# Altium PCB 9981_dome_sheet_PCB.pcbdoc
Units mil, origin at the board's own origin, x right, y up, seen from the top; angles counter-clockwise.
Board outline 5322 x 5187.5 mil, 2 copper layers (Top Layer, Bottom Layer); 80 components, 80 nets, 181 pads, 264 vias.
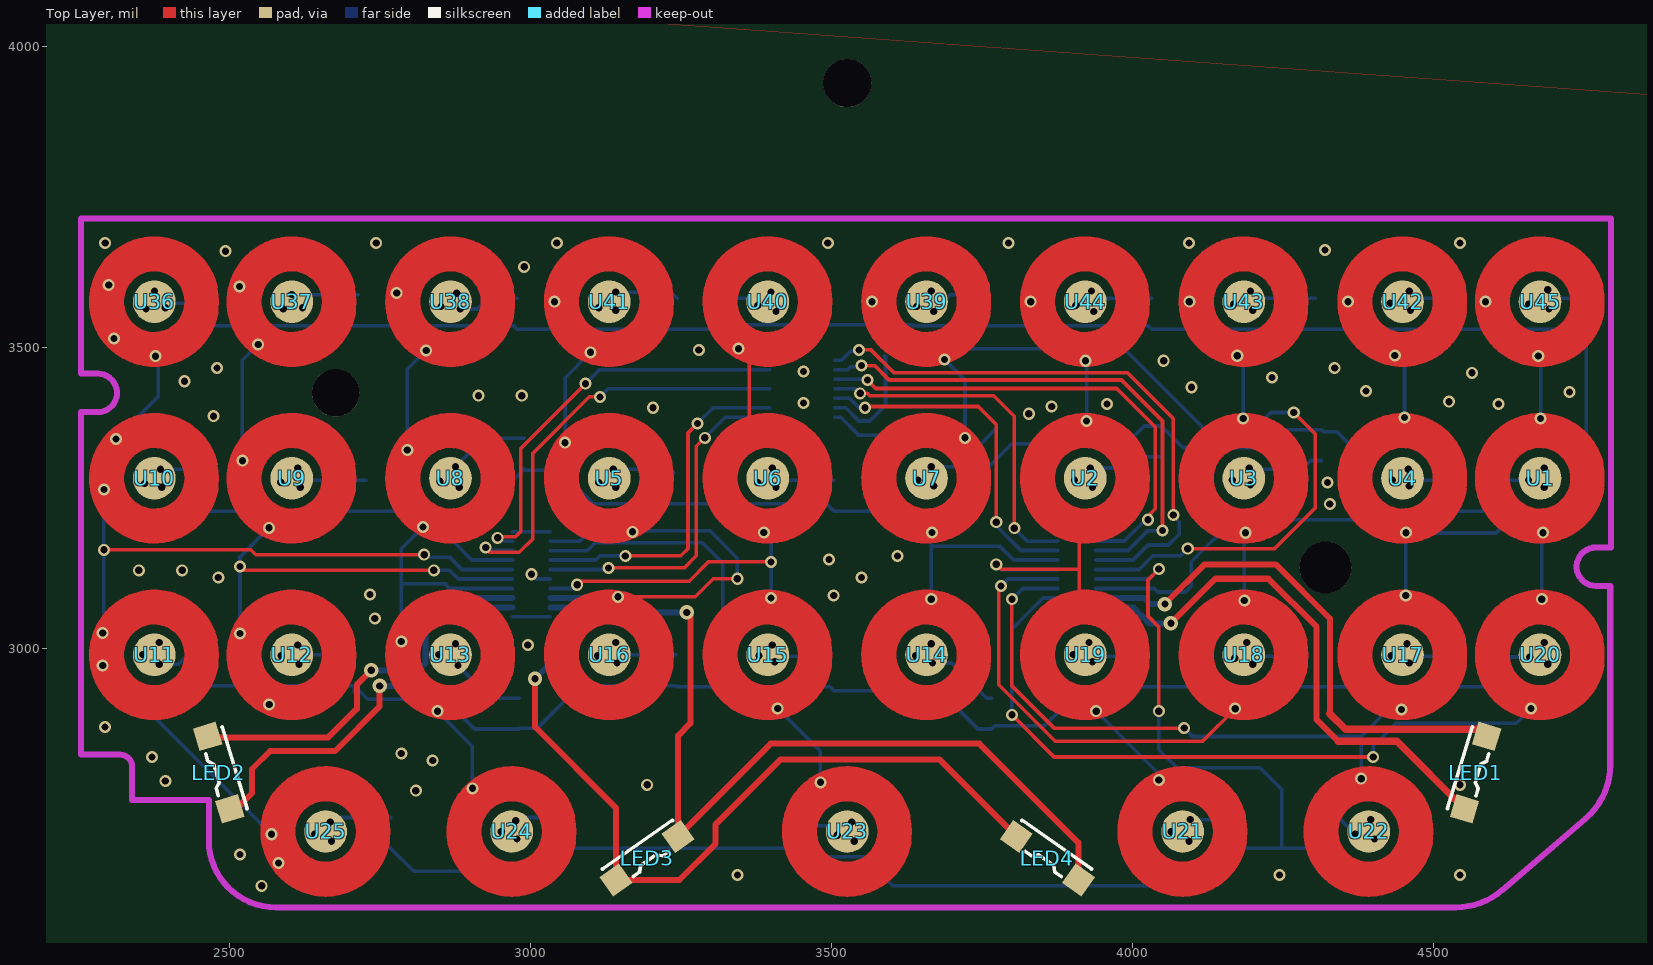
[diagram p0: Top Layer view]
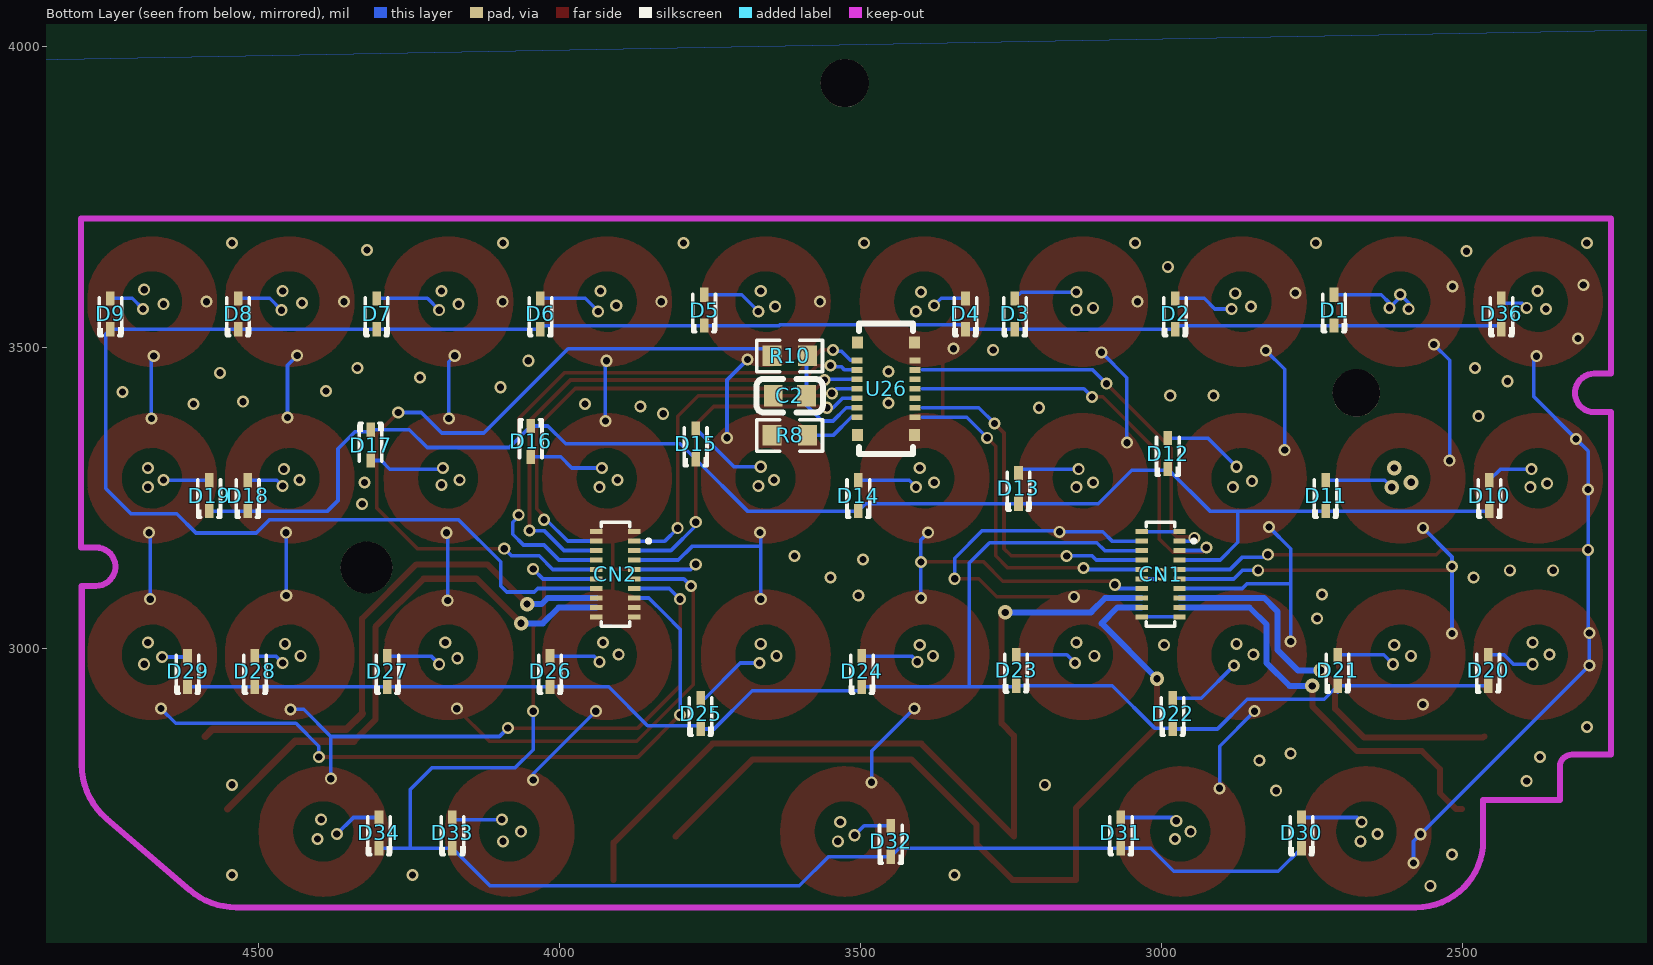
[diagram p1: Bottom Layer view, seen from below]

## Layer stack, top to bottom
Top Layer: signal copper (thickness not stored)
Dielectric: dielectric 12.6, FR-4, Dk 4.8
Bottom Layer: signal copper (thickness not stored)

## Board outline
6322,1000 1000,1000 1000,6187.5 6322,6187.5

## Components (designator, comment, footprint, x,y, rotation, side; value= is the part's Value field where it differs from the comment)
C2 "100nF" C0603 3617.7,3419.89 r0 bottom
CN1 "BM20B(0.8)-16DP-0.4V(51)" CONN-SMD_16P-P0.40_HRS_BM20B-16DP-0.4V 3002.03,3123.45 r270 bottom
CN2 "BM20B(0.8)-16DP-0.4V(51)" CONN-SMD_16P-P0.40_HRS_BM20B-16DP-0.4V 3907.54,3123.45 r270 bottom
D1 "1N4148WT_C232841" SOD-523_L1.2-W0.8-LS1.6-RD 2714,3562 r270 bottom
D2 "1N4148WT_C232841" SOD-523_L1.2-W0.8-LS1.6-RD 2978,3556 r270 bottom
D3 "1N4148WT_C232841" SOD-523_L1.2-W0.8-LS1.6-RD 3244,3556 r270 bottom
D4 "1N4148WT_C232841" SOD-523_L1.2-W0.8-LS1.6-RD 3326,3556 r270 bottom
D5 "1N4148WT_C232841" SOD-523_L1.2-W0.8-LS1.6-RD 3760,3562 r270 bottom
D6 "1N4148WT_C232841" SOD-523_L1.2-W0.8-LS1.6-RD 4032,3556 r270 bottom
D7 "1N4148WT_C232841" SOD-523_L1.2-W0.8-LS1.6-RD 4304,3556 r270 bottom
D8 "1N4148WT_C232841" SOD-523_L1.2-W0.8-LS1.6-RD 4534,3556 r270 bottom
D9 "1N4148WT_C232841" SOD-523_L1.2-W0.8-LS1.6-RD 4746,3556 r270 bottom
D10 "1N4148WT_C232841" SOD-523_L1.2-W0.8-LS1.6-RD 2456,3254 r270 bottom
D11 "1N4148WT_C232841" SOD-523_L1.2-W0.8-LS1.6-RD 2728,3254 r270 bottom
D12 "1N4148WT_C232841" SOD-523_L1.2-W0.8-LS1.6-RD 2990,3324 r270 bottom
D13 "1N4148WT_C232841" SOD-523_L1.2-W0.8-LS1.6-RD 3238,3266 r270 bottom
D14 "1N4148WT_C232841" SOD-523_L1.2-W0.8-LS1.6-RD 3504,3254 r270 bottom
D15 "1N4148WT_C232841" SOD-523_L1.2-W0.8-LS1.6-RD 3774,3340 r270 bottom
D16 "1N4148WT_C232841" SOD-523_L1.2-W0.8-LS1.6-RD 4048,3344 r90 bottom
D17 "1N4148WT_C232841" SOD-523_L1.2-W0.8-LS1.6-RD 4314,3338 r90 bottom
D18 "1N4148WT_C232841" SOD-523_L1.2-W0.8-LS1.6-RD 4518,3254 r270 bottom
D19 "1N4148WT_C232841" SOD-523_L1.2-W0.8-LS1.6-RD 4582,3254 r270 bottom
D20 "1N4148WT_C232841" SOD-523_L1.2-W0.8-LS1.6-RD 2458,2964 r270 bottom
D21 "1N4148WT_C232841" SOD-523_L1.2-W0.8-LS1.6-RD 2708,2964 r270 bottom
D22 "1N4148WT_C232841" SOD-523_L1.2-W0.8-LS1.6-RD 2982,2892 r270 bottom
D23 "1N4148WT_C232841" SOD-523_L1.2-W0.8-LS1.6-RD 3242,2964 r270 bottom
D24 "1N4148WT_C232841" SOD-523_L1.2-W0.8-LS1.6-RD 3498,2962 r270 bottom
D25 "1N4148WT_C232841" SOD-523_L1.2-W0.8-LS1.6-RD 3766,2892 r270 bottom
D26 "1N4148WT_C232841" SOD-523_L1.2-W0.8-LS1.6-RD 4016,2962 r270 bottom
D27 "1N4148WT_C232841" SOD-523_L1.2-W0.8-LS1.6-RD 4286,2962 r270 bottom
D28 "1N4148WT_C232841" SOD-523_L1.2-W0.8-LS1.6-RD 4506,2962 r270 bottom
D29 "1N4148WT_C232841" SOD-523_L1.2-W0.8-LS1.6-RD 4618,2962 r270 bottom
D30 "1N4148WT_C232841" SOD-523_L1.2-W0.8-LS1.6-RD 2768,2694 r270 bottom
D31 "1N4148WT_C232841" SOD-523_L1.2-W0.8-LS1.6-RD 3068,2694 r270 bottom
D32 "1N4148WT_C232841" SOD-523_L1.2-W0.8-LS1.6-RD 3450,2680 r270 bottom
D33 "1N4148WT_C232841" SOD-523_L1.2-W0.8-LS1.6-RD 4178,2694 r270 bottom
D34 "1N4148WT_C232841" SOD-523_L1.2-W0.8-LS1.6-RD 4300,2694 r270 bottom
D36 "1N4148WT_C232841" SOD-523_L1.2-W0.8-LS1.6-RD 2436,3556 r270 bottom
LED1 "TJ-S3806SW1TGLCCW-A5" LED-SMD_L3.8-W1.0-RD 4570,2794 r253 top
LED2 "TJ-S3806SW1TGLCCW-A5" LED-SMD_L3.8-W1.0-RD 2482.8,2793.99 r107 top
LED3 "TJ-S3806SW1TGLCCW-A5" LED-SMD_L3.8-W1.0-RD 3194,2652 r215 top
LED4 "TJ-S3806SW1TGLCCW-A5" LED-SMD_L3.8-W1.0-RD 3858.8,2652 r145 top
R8 "10kΩ" R0603 3618,3354 r180 bottom
R10 "10kΩ" R0603 3618,3486 r0 bottom
U1 "锅仔片_9981" 锅仔片_封装 4677.07,3282.9 r0 top
U2 "锅仔片_9981" 锅仔片_封装 3921.67,3282.9 r0 top
U3 "锅仔片_9981" 锅仔片_封装 4185.22,3282.9 r0 top
U4 "锅仔片_9981" 锅仔片_封装 4448.72,3282.9 r0 top
U5 "锅仔片_9981" 锅仔片_封装 3131.12,3282.9 r0 top
U6 "锅仔片_9981" 锅仔片_封装 3394.63,3282.9 r0 top
U7 "锅仔片_9981" 锅仔片_封装 3658.17,3282.9 r0 top
U8 "锅仔片_9981" 锅仔片_封装 2867.58,3282.9 r0 top
U9 "锅仔片_9981" 锅仔片_封装 2604.08,3282.9 r0 top
U10 "锅仔片_9981" 锅仔片_封装 2375.73,3282.9 r0 top
U11 "锅仔片_9981" 锅仔片_封装 2375.73,2989.59 r0 top
U12 "锅仔片_9981" 锅仔片_封装 2604.08,2989.59 r0 top
U13 "锅仔片_9981" 锅仔片_封装 2867.58,2989.59 r0 top
U14 "锅仔片_9981" 锅仔片_封装 3658.17,2989.59 r0 top
U15 "锅仔片_9981" 锅仔片_封装 3394.62,2989.59 r0 top
U16 "锅仔片_9981" 锅仔片_封装 3131.12,2989.59 r0 top
U17 "锅仔片_9981" 锅仔片_封装 4448.72,2989.59 r0 top
U18 "锅仔片_9981" 锅仔片_封装 4185.22,2989.59 r0 top
U19 "锅仔片_9981" 锅仔片_封装 3921.67,2989.59 r0 top
U20 "锅仔片_9981" 锅仔片_封装 4677.07,2989.59 r0 top
U21 "锅仔片_9981" 锅仔片_封装 4083.49,2696.28 r0 top
U22 "锅仔片_9981" 锅仔片_封装 4392.54,2696.28 r0 top
U23 "锅仔片_9981" 锅仔片_封装 3526.4,2696.28 r0 top
U24 "锅仔片_9981" 锅仔片_封装 2969.31,2696.28 r0 top
U25 "锅仔片_9981" 锅仔片_封装 2660.26,2696.28 r0 top
U26 "5035481420" 5035481420 3458.01,3431.32 r90 bottom
U36 "锅仔片_9981" 锅仔片_封装 2375.73,3576.2 r0 top
U37 "锅仔片_9981" 锅仔片_封装 2604.08,3576.2 r0 top
U38 "锅仔片_9981" 锅仔片_封装 2867.58,3576.2 r0 top
U39 "锅仔片_9981" 锅仔片_封装 3658.17,3576.2 r0 top
U40 "锅仔片_9981" 锅仔片_封装 3394.63,3576.2 r0 top
U41 "锅仔片_9981" 锅仔片_封装 3131.12,3576.2 r0 top
U42 "锅仔片_9981" 锅仔片_封装 4448.72,3576.2 r0 top
U43 "锅仔片_9981" 锅仔片_封装 4185.22,3576.2 r0 top
U44 "锅仔片_9981" 锅仔片_封装 3921.67,3576.2 r0 top
U45 "锅仔片_9981" 锅仔片_封装 4677.07,3576.2 r0 top

## Footprints (in the part's own frame and the unit in brackets; to place one, negate y for a bottom-side part, rotate by r counter-clockwise, add the part's x,y. Pads: shape width x height; smd on the part's side, far side on the other; paste and mask are expansions set on the pad)
5035481420 [mm]
  rect 0.24x0.45 smd paste+0 mask+0.051: 1(1.2,-1.225) 2(1.2,1.225) 3(0.8,-1.225) 4(0.8,1.225) 5(0.4,-1.225) 6(0.4,1.225) 7(0,-1.225) 8(0,1.225) 9(-0.4,-1.225) 10(-0.4,1.225) 11(-0.8,-1.225) 12(-0.8,1.225) 13(-1.2,-1.225) 14(-1.2,1.225)
  rect 0.5x0.47 smd paste+0 mask+0.051: 15(1.95,-1.195) 16(-1.95,-1.195) 17(-1.95,1.195) 18(1.95,1.195)
  silkscreen extent -2.75,-1.14 2.75,1.14
C0603 [mm]
  rect 0.8x0.9 smd paste+0 mask+0.051: 1(0.7,0) 2(-0.7,0)
  silkscreen extent -1.39,-0.72 1.41,0.71
CONN-SMD_16P-P0.40_HRS_BM20B-16DP-0.4V [mm]
  rect 0.2x0.52 smd paste+0 mask+0.051: 1(-1.4,0.8) 2(-1.4,-0.8) 3(-1,0.8) 4(-1,-0.8) 5(-0.6,0.8) 6(-0.6,-0.8) 7(-0.2,0.8) 8(-0.2,-0.8) 9(0.2,0.8) 10(0.2,-0.8) 11(0.6,0.8) 12(0.6,-0.8) 13(1,0.8) 14(1,-0.8) 15(1.4,0.8) 16(1.4,-0.8) 17(1.8,0.8) 18(1.8,-0.8) 19(-1.8,0.8) 20(-1.8,-0.8)
  silkscreen extent -2.2,-0.6 2.2,1.48
LED-SMD_L3.8-W1.0-RD [mm]
  rect 1x1 smd paste+0 mask+0.051: 1(-1.6,0) 2(1.6,0)
  silkscreen extent -1.8,-0.7 1.8,0.3
R0603 [mil]
  rect 31.75x34.02 smd paste-3937.01 mask+2: 1(29.65,0) 2(-29.66,0)
  silkscreen extent -55,-26 55,26
SOD-523_L1.2-W0.8-LS1.6-RD [mm]
  rect 0.6x0.36 smd paste+0 mask+0.051: 1(0.65,0) 2(-0.65,0)
  silkscreen extent -0.68,-0.55 0.91,0.55
锅仔片_封装 [mm]
  round 1.8 smd paste-100 mask+0.05: 1(0,0)
  Top Layer region: 482 vertices and 0 holes, not listed, extent -2.744,-2.743 2.7,2.743

## Free pads (board coordinates)
  round 78.74 hole 78.74 unplated paste+0: ""(2676.98,3424.74) ""(3526.39,3939.16)
  round 80 hole 80 unplated paste+0: ""(3526.39,3939.16)
  round 85.9 hole 85.9 unplated paste+0: ""(4320.93,3134.82)

## Via types
v1: diameter 20, hole 12, Top Layer to Bottom Layer, tented both sides, 255 vias
v2: diameter 24, hole 12, Top Layer to Bottom Layer, tented both sides, 6 vias
v3: diameter 24.41, hole 12.2, Top Layer to Bottom Layer, tented both sides, 3 vias

## Nets (pads, with @x,y where several pads share a name; then routed paths per layer and width w, separated by ;. In a path a pad name is that pad's centre, name@x,y a point inside that pad or via, vN(x,y) a via of type N, cw(c..) or ccw(c..) an arc to the next point about the centre after c; other vN are vias at no path point)
1V8: CN1.8 U26.13 | length 577.4
  Top Layer w6: v1(3130,3134) 3256,3134 3276,3154 3276,3336 v1(3290,3350)
  Bottom Layer w6: CN1.8 3123.3,3131.3 3128,3136 v1(3130,3134) ; v1(3290,3350) 3324.08,3384.08 3397.97,3384.08
2V8: CN1.6 U26.11 | length 581.6
  Top Layer w6: v1(3158,3154) 3250,3154 3262,3166 3262,3358 v1(3278,3374)
  Bottom Layer w6: CN1.6 3109.1,3147.1 3116,3154 v1(3158,3154) ; v1(3278,3374) 3303.83,3399.83 3397.97,3399.83
3V3: CN2.8 R10.1 | length 1277.7
  Top Layer w6: v1(4092,3166) 4236,3166 4304,3234 4304,3356 v1(4268,3392)
  Bottom Layer w6: R10.1 3659.7,3498 3986,3498 4126,3358 4196,3358 4230,3392 v1(4268,3392) ; CN2.8 4011.32,3131.32 4034,3154 4080,3154 v1(4092,3166)
COL0: CN1.7 | length 9643.8
  Top Layer w6: v1(2292,3164) 2536,3164 2544,3156 v1(2824,3156)
  Top Layer w10: 2430.84,2989.59 ccw(c2375.72,2989.59) 2430.84,2989.59 ; 2430.85,3282.9 ccw(c2375.73,3282.9) 2430.85,3282.9 ; 2430.85,3576.2 ccw(c2375.73,3576.2) 2430.85,3576.2 ; 2478.08,2989.59 ccw(c2375.72,2989.59) 2478.08,2989.59 ; 2478.09,3282.9 ccw(c2375.73,3282.9) 2478.09,3282.9 ; 2478.09,3576.2 ccw(c2375.73,3576.2) 2478.09,3576.2 ; 2715.38,2696.28 ccw(c2660.26,2696.28) 2715.38,2696.28 ; 2762.62,2696.28 ccw(c2660.26,2696.28) 2762.62,2696.28
  Top Layer w23.62: 2443.98,2989.59 ccw(c2375.72,2989.59) 2443.98,2989.59 ; 2443.99,3282.9 ccw(c2375.73,3282.9) 2443.99,3282.9 ; 2443.99,3576.2 ccw(c2375.73,3576.2) 2443.99,3576.2 ; 2466.27,2989.59 ccw(c2375.72,2989.59) 2466.27,2989.59 ; 2466.28,3282.9 ccw(c2375.73,3282.9) 2466.28,3282.9 ; 2466.28,3576.2 ccw(c2375.73,3576.2) 2466.28,3576.2 ; 2728.52,2696.28 ccw(c2660.26,2696.28) 2728.52,2696.28 ; 2750.81,2696.28 ccw(c2660.26,2696.28) 2750.81,2696.28
  Bottom Layer w6: v1(2377.7,3485.67) 2382,3481.37 2382,3418 v1(2312,3348) 2292,3328 v1(2292,3264) v1(2292,3164) 2292,3027.78 v1(2290,3025.78) v1(2290,2972) v1(2570.28,2691.72) 2582,2680 v1(2582,2644) ; v1(2824,3156) 2828,3152 2866,3152 2886.7,3131.3 CN1.7
  other v1: 2308.83,3515.18 2300,3604
COL1: CN1.9 | length 6827.4
  Top Layer w6: v1(2518,3136.38) 2524.38,3130 v1(2840,3130)
  Top Layer w10: 2659.19,2989.59 ccw(c2604.07,2989.59) 2659.19,2989.59 ; 2659.2,3282.9 ccw(c2604.08,3282.9) 2659.2,3282.9 ; 2659.2,3576.2 ccw(c2604.08,3576.2) 2659.2,3576.2 ; 2706.43,2989.59 ccw(c2604.07,2989.59) 2706.43,2989.59 ; 2706.44,3282.9 ccw(c2604.08,3282.9) 2706.44,3282.9 ; 2706.44,3576.2 ccw(c2604.08,3576.2) 2706.44,3576.2
  Top Layer w23.62: 2672.33,2989.59 ccw(c2604.07,2989.59) 2672.33,2989.59 ; 2672.34,3282.9 ccw(c2604.08,3282.9) 2672.34,3282.9 ; 2672.34,3576.2 ccw(c2604.08,3576.2) 2672.34,3576.2 ; 2694.62,2989.59 ccw(c2604.07,2989.59) 2694.62,2989.59 ; 2694.63,3282.9 ccw(c2604.08,3282.9) 2694.63,3282.9 ; 2694.63,3576.2 ccw(c2604.08,3576.2) 2694.63,3576.2
  Bottom Layer w6: v1@2518,3020 v1(2518,3136.38) 2518,3152.25 v1(2566.34,3200.59) ; v1(2522,3312) 2522,3478.73 v1(2548.21,3504.94) ; v1(2840,3130) 2866,3130 2880.4,3115.6 CN1.9
  other v1: 2566.58,2907.17 2518,3025.05 2517.05,3601.19
COL2: CN1.11 | length 8673
  Top Layer w10: 2922.7,2989.59 ccw(c2867.58,2989.59) 2922.7,2989.59 ; 2922.7,3282.9 ccw(c2867.58,3282.9) 2922.7,3282.9 ; 2922.7,3576.2 ccw(c2867.58,3576.2) 2922.7,3576.2 ; 2969.94,2989.59 ccw(c2867.58,2989.59) 2969.94,2989.59 ; 2969.94,3282.9 ccw(c2867.58,3282.9) 2969.94,3282.9 ; 2969.94,3576.2 ccw(c2867.58,3576.2) 2969.94,3576.2 ; 3024.44,2696.28 ccw(c2969.32,2696.28) 3024.44,2696.28 ; 3071.68,2696.28 ccw(c2969.32,2696.28) 3071.68,2696.28
  Top Layer w23.62: 2935.84,2989.59 ccw(c2867.58,2989.59) 2935.84,2989.59 ; 2935.84,3282.9 ccw(c2867.58,3282.9) 2935.84,3282.9 ; 2935.84,3576.2 ccw(c2867.58,3576.2) 2935.84,3576.2 ; 2958.13,2989.59 ccw(c2867.58,2989.59) 2958.13,2989.59 ; 2958.13,3282.9 ccw(c2867.58,3282.9) 2958.13,3282.9 ; 2958.13,3576.2 ccw(c2867.58,3576.2) 2958.13,3576.2 ; 3037.58,2696.28 ccw(c2969.32,2696.28) 3037.58,2696.28 ; 3059.87,2696.28 ccw(c2969.32,2696.28) 3059.87,2696.28
  Bottom Layer w6: v1(2786,3012) 2786,3110 ; v1(2796,3330) 2796,3463.9 v1(2827.24,3495.13) ; v1(2822,3202) 2786,3166 2786,3110 ; v1(2846,2896) 2904,2838 v1(2904,2768) ; CN1.11 2866.2,3099.8 2858,3108 2788,3108 2786,3110
  other v1: 2778.21,3590.76
COL3: CN1.2 | length 6710.8
  Top Layer w6: v1(3146,3086) 3274,3086 3304,3116 v1(3344,3116)
  Top Layer w10: 3186.24,2989.59 ccw(c3131.12,2989.59) 3186.24,2989.59 ; 3186.24,3282.9 ccw(c3131.12,3282.9) 3186.24,3282.9 ; 3186.24,3576.2 ccw(c3131.12,3576.2) 3186.24,3576.2 ; 3233.48,2989.59 ccw(c3131.12,2989.59) 3233.48,2989.59 ; 3233.48,3282.9 ccw(c3131.12,3282.9) 3233.48,3282.9 ; 3233.48,3576.2 ccw(c3131.12,3576.2) 3233.48,3576.2
  Top Layer w23.62: 3199.38,2989.59 ccw(c3131.12,2989.59) 3199.38,2989.59 ; 3199.38,3282.9 ccw(c3131.12,3282.9) 3199.38,3282.9 ; 3199.38,3576.2 ccw(c3131.12,3576.2) 3199.38,3576.2 ; 3221.67,2989.59 ccw(c3131.12,2989.59) 3221.67,2989.59 ; 3221.67,3282.9 ccw(c3131.12,3282.9) 3221.67,3282.9 ; 3221.67,3576.2 ccw(c3131.12,3576.2) 3221.67,3576.2
  Bottom Layer w6: CN1.2 3082,3178 3098,3194 v1(3170,3194) 3172,3196 3298,3196 3344,3150 v1(3344,3116) ; v1(3058,3342) 3058,3450 v1(3100,3492)
  other v1: 3040.57,3576.2
COL4: CN1.12 | length 9183.8
  Top Layer w6: v1(3078,3106) 3078,3108 v1@3082,3112 ; 3300.4,3280 3300.4,3304.4 3364,3368 3364,3480 v1(3346,3498) ; v1@3082,3112 3264,3112 ; v1@3082,3112 3264,3112 ; 3264,3112 3296,3144 ; 3264,3112 3296,3144 ; 3296,3144 v1(3400,3144) 3296,3144
  Top Layer w10: 3449.76,2989.59 ccw(c3394.64,2989.59) 3449.76,2989.59 ; 3449.75,3282.9 ccw(c3394.63,3282.9) 3449.75,3282.9 ; 3449.76,3576.2 ccw(c3394.64,3576.2) 3449.76,3576.2 ; 3497,2989.59 ccw(c3394.64,2989.59) 3497,2989.59 ; 3496.99,3282.9 ccw(c3394.63,3282.9) 3496.99,3282.9 ; 3497,3576.2 ccw(c3394.64,3576.2) 3497,3576.2 ; 3581.52,2696.28 ccw(c3526.4,2696.28) 3581.52,2696.28 ; 3628.76,2696.28 ccw(c3526.4,2696.28) 3628.76,2696.28
  Top Layer w23.62: 3462.9,2989.59 ccw(c3394.64,2989.59) 3462.9,2989.59 ; 3462.89,3282.9 ccw(c3394.63,3282.9) 3462.89,3282.9 ; 3462.9,3576.2 ccw(c3394.64,3576.2) 3462.9,3576.2 ; 3485.19,2989.59 ccw(c3394.64,2989.59) 3485.19,2989.59 ; 3485.18,3282.9 ccw(c3394.63,3282.9) 3485.18,3282.9 ; 3485.19,3576.2 ccw(c3394.64,3576.2) 3485.19,3576.2 ; 3594.66,2696.28 ccw(c3526.4,2696.28) 3594.66,2696.28 ; 3616.95,2696.28 ccw(c3526.4,2696.28) 3616.95,2696.28
  Bottom Layer w6: CN1.12 3071.8,3099.8 v1(3078,3106) ; v1(3387.93,3192.6) 3400,3180.53 v1(3400,3084) ; v1(3411.07,2900.54) 3482,2829.61 v1(3482,2778)
COL5: CN2.5 | length 6436.8
  Top Layer w10: 3713.29,2989.59 ccw(c3658.17,2989.59) 3713.29,2989.59 ; 3713.29,3282.9 ccw(c3658.17,3282.9) 3713.29,3282.9 ; 3713.29,3576.2 ccw(c3658.17,3576.2) 3713.29,3576.2 ; 3760.53,2989.59 ccw(c3658.17,2989.59) 3760.53,2989.59 ; 3760.53,3282.9 ccw(c3658.17,3282.9) 3760.53,3282.9 ; 3760.53,3576.2 ccw(c3658.17,3576.2) 3760.53,3576.2
  Top Layer w23.62: 3726.43,2989.59 ccw(c3658.17,2989.59) 3726.43,2989.59 ; 3726.43,3282.9 ccw(c3658.17,3282.9) 3726.43,3282.9 ; 3726.43,3576.2 ccw(c3658.17,3576.2) 3726.43,3576.2 ; 3748.72,2989.59 ccw(c3658.17,2989.59) 3748.72,2989.59 ; 3748.72,3282.9 ccw(c3658.17,3282.9) 3748.72,3282.9 ; 3748.72,3576.2 ccw(c3658.17,3576.2) 3748.72,3576.2
  Bottom Layer w6: v1(3666,3082) 3666,3191.61 v1(3667.19,3192.8) ; 3666,3169.7 3780.3,3169.7 3802.9,3147.1 CN2.5@3876.1,3147.1 ; v1(3688,3480) 3722,3446 v1(3722,3350)
  other v1: 3567.62,3576.2
COL6: CN2.7 | length 8817.6
  Top Layer w6: v1(3774,3140) 3782,3132 3808,3132 3911.55,3132 3912,3131.55 ; 3827.5,2986.7 3827.5,3005.5 3912,3090 3912,3195.5 3827.5,3280
  Top Layer w10: 3976.79,2989.59 ccw(c3921.67,2989.59) 3976.79,2989.59 ; 3976.79,3282.9 ccw(c3921.67,3282.9) 3976.79,3282.9 ; 3976.81,3576.2 ccw(c3921.69,3576.2) 3976.81,3576.2 ; 4024.03,2989.59 ccw(c3921.67,2989.59) 4024.03,2989.59 ; 4024.03,3282.9 ccw(c3921.67,3282.9) 4024.03,3282.9 ; 4024.05,3576.2 ccw(c3921.69,3576.2) 4024.05,3576.2 ; 4138.61,2696.28 ccw(c4083.49,2696.28) 4138.61,2696.28 ; 4185.85,2696.28 ccw(c4083.49,2696.28) 4185.85,2696.28
  Top Layer w23.62: 3989.93,2989.59 ccw(c3921.67,2989.59) 3989.93,2989.59 ; 3989.93,3282.9 ccw(c3921.67,3282.9) 3989.93,3282.9 ; 3989.95,3576.2 ccw(c3921.69,3576.2) 3989.95,3576.2 ; 4012.22,2989.59 ccw(c3921.67,2989.59) 4012.22,2989.59 ; 4012.22,3282.9 ccw(c3921.67,3282.9) 4012.22,3282.9 ; 4012.24,3576.2 ccw(c3921.69,3576.2) 4012.24,3576.2 ; 4151.75,2696.28 ccw(c4083.49,2696.28) 4151.75,2696.28 ; 4174.04,2696.28 ccw(c4083.49,2696.28) 4174.04,2696.28
  Bottom Layer w6: v1(3774,3140) 3782.68,3131.32 CN2.7@3876.05,3131.32 ; v1(3922,3478) 3924,3476 v1(3924,3378) ; v1(3940,2896) 4044,2792 v1(4044,2782)
  other v1: 3831.14,3576.2
COL7: CN2.9 | length 6902.1
  Top Layer w6: v1(3782,3104) 3778,3100 3778,2940 3872,2846 4096,2846 4116.63,2846 v1(4170.82,2900.19)
  Top Layer w10: 4240.34,2989.59 ccw(c4185.22,2989.59) 4240.34,2989.59 ; 4240.33,3282.9 ccw(c4185.21,3282.9) 4240.33,3282.9 ; 4240.34,3576.2 ccw(c4185.22,3576.2) 4240.34,3576.2 ; 4287.57,3282.9 ccw(c4185.21,3282.9) 4287.57,3282.9 ; 4287.58,2989.59 ccw(c4185.22,2989.59) 4287.58,2989.59 ; 4287.58,3576.2 ccw(c4185.22,3576.2) 4287.58,3576.2
  Top Layer w23.62: 4253.47,3282.9 ccw(c4185.21,3282.9) 4253.47,3282.9 ; 4253.48,2989.59 ccw(c4185.22,2989.59) 4253.48,2989.59 ; 4253.48,3576.2 ccw(c4185.22,3576.2) 4253.48,3576.2 ; 4275.77,2989.59 ccw(c4185.22,2989.59) 4275.77,2989.59 ; 4275.76,3282.9 ccw(c4185.21,3282.9) 4275.76,3282.9 ; 4275.77,3576.2 ccw(c4185.22,3576.2) 4275.77,3576.2
  Bottom Layer w6: v1(3782,3104) 3793.58,3115.58 CN2.9@3876.05,3115.58 ; v1(4174.21,3486.32) 4184,3476.53 v1(4184,3382) ; v1(4186,3080) 4186,3190.66 v1(4187.72,3192.38)
  other v1: 4094.67,3576.2
COL8: CN2.11 | length 9161.1
  Top Layer w6: v1(3800,3082) 3800,2938 3870,2868 v1(4086,2868)
  Top Layer w10: 4447.66,2696.28 ccw(c4392.54,2696.28) 4447.66,2696.28 ; 4494.9,2696.28 ccw(c4392.54,2696.28) 4494.9,2696.28 ; 4503.85,2989.59 ccw(c4448.73,2989.59) 4503.85,2989.59 ; 4503.85,3282.9 ccw(c4448.73,3282.9) 4503.85,3282.9 ; 4503.85,3576.2 ccw(c4448.73,3576.2) 4503.85,3576.2 ; 4551.09,2989.59 ccw(c4448.73,2989.59) 4551.09,2989.59 ; 4551.09,3282.9 ccw(c4448.73,3282.9) 4551.09,3282.9 ; 4551.09,3576.2 ccw(c4448.73,3576.2) 4551.09,3576.2
  Top Layer w23.62: 4460.8,2696.28 ccw(c4392.54,2696.28) 4460.8,2696.28 ; 4483.09,2696.28 ccw(c4392.54,2696.28) 4483.09,2696.28 ; 4516.99,2989.59 ccw(c4448.73,2989.59) 4516.99,2989.59 ; 4516.99,3282.9 ccw(c4448.73,3282.9) 4516.99,3282.9 ; 4516.99,3576.2 ccw(c4448.73,3576.2) 4516.99,3576.2 ; 4539.28,2989.59 ccw(c4448.73,2989.59) 4539.28,2989.59 ; 4539.28,3282.9 ccw(c4448.73,3282.9) 4539.28,3282.9 ; 4539.28,3576.2 ccw(c4448.73,3576.2) 4539.28,3576.2
  Bottom Layer w6: v1(3800,3082) 3817.83,3099.83 CN2.11@3876.05,3099.83 ; v1(4086,2868) 4100,2854 4380,2854 ; v1(4380,2784) 4380,2854 ; v1(4435.85,3486.57) 4452,3470.42 v1(4452,3384) ; v1(4446.92,2899.06) 4425.1,2899.1 4380,2854 ; v1(4454,3088) 4454,3191.93 v1(4454.61,3192.54)
  other v1: 4358.18,3576.2
COL9: CN2.13 | length 7352.9
  Top Layer w6: v1(3800,2890) 3870,2820 v1(4400,2820)
  Top Layer w10: 4732.19,2989.59 ccw(c4677.07,2989.59) 4732.19,2989.59 ; 4732.2,3282.9 ccw(c4677.08,3282.9) 4732.2,3282.9 ; 4732.2,3576.2 ccw(c4677.08,3576.2) 4732.2,3576.2 ; 4779.43,2989.59 ccw(c4677.07,2989.59) 4779.43,2989.59 ; 4779.44,3282.9 ccw(c4677.08,3282.9) 4779.44,3282.9 ; 4779.44,3576.2 ccw(c4677.08,3576.2) 4779.44,3576.2
  Top Layer w23.62: 4745.33,2989.59 ccw(c4677.07,2989.59) 4745.33,2989.59 ; 4745.34,3282.9 ccw(c4677.08,3282.9) 4745.34,3282.9 ; 4745.34,3576.2 ccw(c4677.08,3576.2) 4745.34,3576.2 ; 4767.62,2989.59 ccw(c4677.07,2989.59) 4767.62,2989.59 ; 4767.63,3282.9 ccw(c4677.08,3282.9) 4767.63,3282.9 ; 4767.63,3576.2 ccw(c4677.08,3576.2) 4767.63,3576.2
  Bottom Layer w6: v1(3800,2890) 3800,3032 3824,3056 3852.08,3084.08 CN2.13 ; v1(4400,2820) 4400,2838 4438,2876 4637.57,2876 v1(4661.9,2900.32) ; v1(4674.04,3485.7) 4678,3481.75 v1(4678,3382) ; v1(4680,3082) 4680,3190.46 v1(4682.03,3192.48)
  other v1: 4586.53,3576.2
GND: C2.1 CN1.10 CN1.17 CN1.18 CN1.19 CN1.20 CN2.15 CN2.17 CN2.18 CN2.19 CN2.20 R8.2 U26.1 U26.5 U26.9 U26.15 U26.16 U26.17 U26.18 | length 160.7
  Bottom Layer w6: CN1.17 CN1.18 ; CN1.19 CN1.20 ; v1(3002.03,3123.45) 3009.9,3115.58 CN1.10
  other v1: 2554,2606 3344.2,2623.8 4244.2,2623.8 4544.2,2623.8 2518,2658 2810,2764 3194.2,2773.8 4544.2,2773.8 2394,2780 2838,2814 2372,2820 2786,2826 2294,2870 2996,3006 2742,3050 3504,3088 2734,3090 2482,3118 3550,3118 2350,3130 2422,3130 3496,3148 3610,3154 4328,3240 4324,3276 2474,3386 3828,3390 3204,3400 3866,3402 3958,3406 4608,3406 3454,3408 4526,3410 2914,3420 2986,3420 4726,3426 4388,3428 4098,3434 2426,3444 4232,3450 4564,3458 3454,3460 2480,3466 4336,3466 4052,3478 3280,3496 2990,3634 2494,3660 4320,3662 2294.2,3673.8 2744.2,3673.8 3044.2,3673.8 3494.2,3673.8 3794.2,3673.8 4094.2,3673.8 4544.2,3673.8
KEYA2: CN2.4 U26.4 | length 891.5
  Top Layer w6: v1(3550,3470) 3572,3470 3596,3446 3982,3446 4050,3378 v1(4050,3196)
  Bottom Layer w6: U26.4 3526.82,3462.82 3532,3468 3548,3468 v1(3550,3470) ; CN2.4 3992.82,3162.82 4026,3196 v1(4050,3196)
KEYB2: CN2.6 U26.2 | length 969.1
  Top Layer w6: v1(3546,3496) 3566,3496 3604,3458 3992,3458 4068,3382 v1(4068,3222)
  Bottom Layer w6: U26.2 3516.57,3478.57 3532,3494 3544,3494 v1(3546,3496) ; CN2.6 4001.1,3147.1 4026,3172 4060,3172 4078,3190 4078,3210 4068,3220 v1(4068,3222)
LEDA: CN2.1 U26.8 | length 583.7
  Top Layer w6: v1(3548,3424) 3560,3424 3564,3420 3770,3420 3804,3386 v1(3804,3200)
  Bottom Layer w6: U26.8 3540.68,3431.32 v1(3548,3424) ; v1(3804,3200) 3826,3178 3832,3178 CN2.1@3876.1,3178.6
LEDA_A: CN2.16 LED1.2 | length 1300.7
  Top Layer w10: v2(4064,3042) 4138,3116 4226,3116 ; 4146,3116 4226,3116 ; 4226,3116 4306,3036 ; 4226,3116 4306,3036 ; 4306,2882 4342,2846 4306,2882 ; 4306,2882 4306,3036 ; 4306,2882 4306,3036
  Top Layer w12: 4342,2846 4439.34,2846 LED1.2
  Bottom Layer w10: CN2.16 4001.67,3068.33 4028,3042 v2(4064,3042)
LEDA_B: CN1.13 LED2.2 | length 899.8
  Top Layer w10: LED2.2 2466.63,2852 2664,2852 2712,2900 2712,2940 v2(2736,2964)
  Bottom Layer w10: v2(2736,2964) 2774,2964 2808,2998 ; 2808,2998 2808,3062 ; 2808,2998 2808,3062 ; 2808,3062 2830.1,3084.1 ; 2808,3062 2830.1,3084.1 ; 2830.1,3084.1 CN1.13 2830.1,3084.1
LEDA_D: CN1.15 LED2.1 | length 908.9
  Top Layer w10: LED2.1 2511.76,2733.76 2538,2760 2538,2800 2568,2830 2676,2830 2750,2904 v2(2750,2938)
  Bottom Layer w10: v2(2750,2938) 2788,2938 2826,2976 ; 2826,2976 2826,3040 ; 2826,2976 2826,3040 ; 2826,3040 2854.3,3068.3 ; 2826,3040 2854.3,3068.3 ; 2854.3,3068.3 CN1.15 2854.3,3068.3
LEDA_D2: CN2.14 LED1.1 | length 891.8
  Top Layer w10: v2(4054,3074) 4120,3140 4238,3140 4328,3050 4328,2892
  Top Layer w12: 4328,2892 4354,2866 4576.7,2866 LED1.1
  Bottom Layer w10: CN2.14 4019.92,3084.08 4030,3074 v2(4054,3074)
LEDB_+: CN1.16 LED3.2 LED4.2 | length 1418.7
  Top Layer w10: v2(3008,2950) 3008,2870 3142.4,2735.6 LED3.2 3247.9,2615.9 3308,2676 3308,2708 3416,2816 3679.3,2816 LED4.2
  Bottom Layer w10: v2@3008,2948 v2(3008,2950) 3100,3042 3073.67,3068.33 CN1.16
LEDB_D: CN1.14 LED3.1 LED4.1 | length 1477.6
  Top Layer w10: v2(3260,3060) 3266,3054 3266,2876 3245.6,2855.6 LED3.1 3399.47,2842 3746,2842 3910.4,2677.6 LED4.1
  Bottom Layer w10: CN1.14 3093.92,3084.08 3116,3062 3118,3060 v2(3260,3060)
ROW0: CN2.12 D1.1 D2.1 D3.1 D4.1 D5.1 D6.1 D7.1 D8.1 D9.1 D36.1 | length 3530
  Bottom Layer w6: D36.1 2442,3536.41 D1.1 2972,3536.41 D2.1 D3.1 D4.1 ; CN2.12 4036.2,3099.8 4042,3094 4088,3094 4098,3104 4098,3110 4098,3144 4168,3214 4482,3214 4504,3192 4604,3192 4636,3224 4712,3224 4754,3266 4754,3522.4 D9.1 D8.1 D7.1 D6.1 4026,3536.41 D5.1 3635.59,3536.41 3634,3538 3333.59,3538 ; D4.1 3333.6,3538 ; D4.1 3333.59,3538
ROW1: CN1.5 D10.1 D11.1 D12.1 D13.1 D14.1 D15.1 D16.1 D17.1 D18.1 D19.1 | length 2536.9
  Bottom Layer w6: D10.1 D11.1 2920,3228.41 D12.1 2992.41,3296 3050,3296 3105.59,3240.41 D13.1 3492,3240.41 D14.1 3688,3228.41 D15.1 3799.59,3340 3990,3340 4019.6,3369.6 D16.1 4083.59,3334 4220,3334 4249.59,3363.59 D17.1 4317.59,3360 4340,3360 4368,3332 4368,3246 4385.59,3228.41 4398,3228.41 D19.1 ; 2873.63,3228.41 2873.63,3176.37 2902.93,3147.07 CN1.5
ROW2: CN1.4 D20.1 D21.1 D22.1 D23.1 D24.1 D25.1 D26.1 D27.1 D28.1 D29.1 | length 2800.3
  Bottom Layer w6: D20.1 D21.1 ; D21.1@2708,2928 D21.1 ; CN1.4 3094.8,3162.8 3108,3176 3286,3176 3319.5,3142.5 3319.5,2936.4 ; D29.1 D28.1 D27.1 D26.1 3918.4,2936.4 3854,2872 3771.6,2872 D25.1 3743.59,2866.41 3680,2930 3504.41,2930 D24.1 3244,2936.41 D23.1 3082.41,2938.41 3012,2868 2983.59,2868 D22.1 2907.6,2866.4 2858,2916 2730.4,2916 D21.1
ROW3: CN2.10 D30.1 D31.1 D32.1 D33.1 D34.1 | length 2371.5
  Top Layer w6: v1(4044,2896) 4044,3036 4026,3054 4026,3114 v1(4044,3132)
  Bottom Layer w6: D30.1 2806.4,2630 2980,2630 3018.4,2668.4 D31.1 3436,2668.41 D32.1 3553.59,2654.41 3602,2606 4115.59,2606 D33.1 D34.1 ; CN2.10 4027.58,3115.58 v1(4044,3132) ; v1(4044,2896) 4044,2832 4074,2802 4212,2802 4248,2766 4248,2669.42 4246.99,2668.41
S$48758: 
S$106554: 
S$183614: 
S$183618: 
S$183622: 
S$183626: 
S$183630: 
S$183634: 
S$183641: 
S$183645: 
S$183653: 
S$201672: 
TP_MOTION2_1V8: CN2.2 U26.6 | length 825.1
  Top Layer w6: v1(3560,3446) 3574,3432 3974,3432 4038,3368 4038,3232 4026,3220 v1(4026,3214)
  Bottom Layer w6: U26.6 3558.93,3447.07 v1(3560,3446) ; CN2.2 3986.6,3178.6 4022,3214 v1(4026,3214)
TP_RESET3_1V8: C2.2 R10.2 U26.12 | length 186.4
  Bottom Layer w6: U26.12 3524.17,3399.83 3546,3378 3564,3378 3590.14,3404.14 C2.2 3590.14,3484.2 R10.2
TP_SCL_1V8: CN1.1 U26.3 | length 675.1
  Top Layer w6: v1(2946,3184) 2948,3186 2976,3186 2984,3194 2984,3332 v1(3092,3440)
  Bottom Layer w6: v1(2946,3184) 2951.43,3178.57 CN1.1 ; v1(3092,3440) 3114.82,3462.82 3397.97,3462.82
TP_SDA_1V8: CN1.3 U26.7 | length 718.7
  Top Layer w6: v1(2926,3168) 2926,3166 2932,3160 2982,3160 3004,3182 3004,3324 3098,3418 v1(3116,3418)
  Bottom Layer w6: v1(2926,3168) 2931.18,3162.82 CN1.3 ; v1(3116,3418) 3129.32,3431.32 3397.97,3431.32
TP_SHUTDOWN2_1V8: R8.1 U26.14 | length 94.6
  Bottom Layer w6: U26.14 3515.92,3384.08 3546,3354 R8.1@3588.35,3354
TPBLK_LEDK2: CN2.3 U26.10 | length 574.6
  Top Layer w6: v1(3556,3400) 3558,3402 3744,3402 3774,3372 v1(3774,3210)
  Bottom Layer w6: U26.10 3530.42,3415.58 3546,3400 v1(3556,3400) ; v1(3774,3210) 3774,3204 3815.18,3162.82 CN2.3
U1_1: D19.2 U1.1 | length 76
  Bottom Layer w6: D19.2 v1(4658,3280)
  other v1: 4684,3268 4684,3300
U2_1: D16.2 U2.1 | length 125.6
  Bottom Layer w6: v1(3930,3300) 3980,3300 3998.4,3318.4 D16.2
  other v1: 3934,3268 3904,3280
U3_1: D17.2 U3.1 | length 126.8
  Bottom Layer w6: v1(4194,3300) 4196,3298 4282,3298 4296.41,3312.41 D17.2
  other v1: 4196,3272 4166,3280
U4_1: D18.2 U4.1 | length 62
  Bottom Layer w6: v1(4460,3270) 4469.59,3279.59 D18.2
  other v1: 4432,3280 4458,3298
U5_1: D13.2 U5.1 | length 102.7
  Bottom Layer w6: v1(3138,3298) 3231.59,3298 D13.2
  other v1: 3142,3268 3114,3276
U6_1: D14.2 U6.1 | length 100.8
  Bottom Layer w6: v1(3408,3268) 3419.59,3279.59 D14.2
  other v1: 3378,3276 3402,3300
U7_1: D15.2 U7.1 | length 134.3
  Bottom Layer w6: v1(3666,3302) 3710.41,3302 D15.2
  other v1: 3670,3270 3644,3280
U8_1: D12.2 U8.1 | length 133.7
  Bottom Layer w6: v1(2876,3302) 2923.59,3349.59 D12.2
  other v1: 2882,3268 2850,3278
U9_1: D11.2 U9.1 | length 114.8
  Bottom Layer w6: v3(2618,3268) 2629.59,3279.59 D11.2
  other v3: 2586,3276 2614,3300
U10_1: D10.2 U10.1 | length 77.6
  Bottom Layer w6: v1(2386,3298) 2437.6,3298 D10.2
  other v1: 2388,3268 2360,3274
U11_1: D20.2 U11.1 | length 80.5
  Bottom Layer w6: v1(2384,2974) 2416,2974 2431.6,2989.6 D20.2
  other v1: 2356,2990 2384,3010
U12_1: D21.2 U12.1 | length 98.5
  Bottom Layer w6: v1(2616,2974) 2631.59,2989.59 D21.2
  other v1: 2586,2988 2614,3006
U13_1: D22.2 U13.1 | length 124.5
  Bottom Layer w6: v1(2880,2972) 2934.41,2917.59 D22.2
  other v1: 2848,2990 2876,3008
U14_1: D25.2 U14.1 | length 122.2
  Bottom Layer w6: v1(3668,2976) 3700,2976 3758.4,2917.6 D25.2
  other v1: 3640,2988 3666,3008
U15_1: D24.2 U15.1 | length 96
  Bottom Layer w6: v1(3406,2978) 3415.59,2987.59 D24.2
  other v1: 3380,2988 3402,3006
U16_1: D23.2 U16.1 | length 103.6
  Bottom Layer w6: v1(3144,2976) 3157.59,2989.59 D23.2
  other v1: 3112,2988 3142,3010
U17_1: D28.2 U17.1 | length 50.8
  Bottom Layer w6: v1(4460,2976) 4471.59,2987.59 D28.2
  other v1: 4430,2988 4456,3008
U18_1: D27.2 U18.1 | length 91.6
  Bottom Layer w6: v1(4200,2974) 4213.59,2987.59 D27.2
  other v1: 4170,2984 4190,3010
U19_1: D26.2 U19.1 | length 86
  Bottom Layer w6: v1(3934,2978) 3943.59,2987.59 D26.2
  other v1: 3902,2990 3928,3010
U20_1: D29.2 U20.1 | length 42.7
  Bottom Layer w6: D29.2 4619.59,2986 v1(4660,2986)
  other v1: 4690,2974 4684,3010
U21_1: D33.2 U21.1 | length 73.5
  Bottom Layer w6: 4106,2716 4174.41,2716 D33.2
  other v1: 4094,2680 4064,2696 4096,2716
U22_1: D34.2 U22.1 | length 81.4
  Bottom Layer w6: D34.2 4342.41,2719.59 v1(4370,2692)
  other v1: 4402,2684 4396,2716
U23_1: D32.2 U23.1 | length 66.5
  Bottom Layer w6: D32.2 3494.41,2705.59 v1(3510,2690)
  other v1: 3538,2680 3534,2712
U24_1: D31.2 U24.1 | length 94.3
  Bottom Layer w6: v1(2976,2714) 2981.59,2719.59 D31.2
  other v1: 2978,2684 2952,2696
U25_1: D30.2 U25.1 | length 103.1
  Bottom Layer w6: v1(2668,2712) 2675.59,2719.59 D30.2
  other v1: 2670,2680 2642,2692
U36_1: D36.2 U36.1 | length 45.1
  Bottom Layer w6: v1(2394,3566) 2401.59,3573.59 D36.2@2436,3573.59
  other v1: 2362,3564 2376,3594
U37_1: D1.2 U37.1 | length 164.9
  Bottom Layer w6: v1(2590,3564) 2590,3574 v1(2604,3588) 2604,3584 v1(2622,3566) 2622,3574 2635.59,3587.59 D1.2
U38_1: D2.2 U38.1 | length 101.3
  Bottom Layer w6: v1(2884,3564) 2912,3564 2929.6,3581.6 D2.2
  other v1: 2852,3568 2878,3590
U39_1: D5.2 U39.1 | length 101.4
  Bottom Layer w6: v1(3670,3560) 3697.59,3587.59 D5.2
  other v1: 3642,3568 3666,3594
U40_1: D4.2 U40.1 | length 56.8
  Bottom Layer w6: D4.2 3366.41,3581.59 v1(3378,3570)
  other v1: 3408,3560 3400,3592
U41_1: D3.2 U41.1 | length 106.3
  Bottom Layer w6: v1(3142,3592) 3233.59,3592 D3.2
  other v1: 3142,3562 3114,3566
U42_1: D8.2 U42.1 | length 80.1
  Bottom Layer w6: v1(4462,3562) 4481.59,3581.59 D8.2
  other v1: 4428,3574 4460,3594
U43_1: D7.2 U43.1 | length 112.1
  Bottom Layer w6: v1(4200,3562) 4219.59,3581.59 D7.2
  other v1: 4168,3572 4196,3594
U44_1: D6.2 U44.1 | length 104.9
  Bottom Layer w6: v1(3936,3560) 3957.59,3581.59 D6.2
  other v1: 3906,3570 3932,3594
U45_1: D9.2 U45.1 | length 61.3
  Bottom Layer w6: v1(4692,3564) 4709.59,3581.59 D9.2
  other v1: 4658,3572 4690,3596

## Polygon pours and split planes (outlines as drawn)
GND on Bottom Layer (solid): 1744,4036 1736,4028 1736,1894 2130,1500 5822,1500 5194,2128 5194,3972
GND on Top Layer (solid): 1750,4144 1500,3894 1500,2244 1772,1972 5536,1972 5628,2064 5628,3864

## Keep-outs
Keep-Out Layer:
  lines w10: 2319.16,2823.73 cw(c2319.16,2804.03) 2338.86,2804.03 ; 4537.27,2570.3 ccw(c4537.27,2688.41) 4614.25,2598.83
  lines w10 net S$183614: 2281.86,3392.76 ccw(c2281.86,3424.65) 2281.86,3456.54
  lines w10 net S$183630: 4769.84,3104.12 cw(c4769.72,3136.01) 4769.84,3167.9
  lines w10 net S$183641: 4752.51,2717.65 ccw(c4675.54,2807.22) 4793.65,2807.22
  lines w10 net S$48758: 2466.27,2681.56 ccw(c2577.52,2681.56) 2577.52,2570.3

## Silkscreen, mask and mechanical layers (free items; w line width, h text height)
Top Solder:
  circle w10 net U36_1: c2375.73,3576.2 r104.33
  circle w23.62 net U36_1: c2375.73,3576.2 r90.55
  circle w23.62 net U36_1: c2375.73,3576.2 r68.26
  circle w10 net U36_1: c2375.73,3576.2 r53.15
  circle w10 net U36_1: c2604.08,3576.2 r53.15
  circle w23.62 net U36_1: c2604.08,3576.2 r68.26
  circle w23.62 net U36_1: c2604.08,3576.2 r90.55
  circle w10 net U36_1: c2604.08,3576.2 r104.33
  circle w10 net U36_1: c2867.58,3576.2 r104.33
  circle w23.62 net U36_1: c2867.58,3576.2 r90.55
  circle w23.62 net U36_1: c2867.58,3576.2 r68.26
  circle w10 net U36_1: c2867.58,3576.2 r53.15
  circle w10 net U36_1: c3131.12,3576.2 r104.33
  circle w23.62 net U36_1: c3131.12,3576.2 r90.55
  circle w23.62 net U36_1: c3131.12,3576.2 r68.26
  circle w10 net U36_1: c3131.12,3576.2 r53.15
  circle w10 net U36_1: c3394.64,3576.2 r104.33
  circle w23.62 net U36_1: c3394.64,3576.2 r90.55
  circle w23.62 net U36_1: c3394.64,3576.2 r68.26
  circle w10 net U36_1: c3394.64,3576.2 r53.15
  circle w10 net U36_1: c3658.17,3576.2 r104.33
  circle w23.62 net U36_1: c3658.17,3576.2 r90.55
  circle w23.62 net U36_1: c3658.17,3576.2 r68.26
  circle w10 net U36_1: c3658.17,3576.2 r53.15
  circle w10 net U36_1: c3921.69,3576.2 r104.33
  circle w23.62 net U36_1: c3921.69,3576.2 r90.55
  circle w23.62 net U36_1: c3921.69,3576.2 r68.26
  circle w10 net U36_1: c3921.69,3576.2 r53.15
  circle w10 net U36_1: c4185.22,3576.2 r104.33
  circle w23.62 net U36_1: c4185.22,3576.2 r90.55
  circle w23.62 net U36_1: c4185.22,3576.2 r68.26
  circle w10 net U36_1: c4185.22,3576.2 r53.15
  circle w10 net U36_1: c4448.73,3576.2 r104.33
  circle w23.62 net U36_1: c4448.73,3576.2 r90.55
  circle w23.62 net U36_1: c4448.73,3576.2 r68.26
  circle w10 net U36_1: c4448.73,3576.2 r53.15
  circle w10 net U36_1: c4677.08,3576.2 r104.33
  circle w23.62 net U36_1: c4677.08,3576.2 r90.55
  circle w23.62 net U36_1: c4677.08,3576.2 r68.26
  circle w10 net U36_1: c4677.08,3576.2 r53.15
  circle w10 net U36_1: c4677.08,3282.9 r104.33
  circle w23.62 net U36_1: c4677.08,3282.9 r90.55
  circle w23.62 net U36_1: c4677.08,3282.9 r68.26
  circle w10 net U36_1: c4677.08,3282.9 r53.15
  circle w10 net U36_1: c4448.73,3282.9 r104.33
  circle w23.62 net U36_1: c4448.73,3282.9 r90.55
  circle w23.62 net U36_1: c4448.73,3282.9 r68.26
  circle w10 net U36_1: c4448.73,3282.9 r53.15
  circle w10 net U36_1: c4185.21,3282.9 r104.33
  circle w23.62 net U36_1: c4185.21,3282.9 r90.55
  circle w23.62 net U36_1: c4185.21,3282.9 r68.26
  circle w10 net U36_1: c4185.21,3282.9 r53.15
  circle w10 net U36_1: c3921.67,3282.9 r104.33
  circle w23.62 net U36_1: c3921.67,3282.9 r90.55
  circle w23.62 net U36_1: c3921.67,3282.9 r68.26
  circle w10 net U36_1: c3921.67,3282.9 r53.15
  circle w10 net U36_1: c3658.17,3282.9 r104.33
  circle w23.62 net U36_1: c3658.17,3282.9 r90.55
  circle w23.62 net U36_1: c3658.17,3282.9 r68.26
  circle w10 net U36_1: c3658.17,3282.9 r53.15
  circle w10 net U36_1: c3394.63,3282.9 r104.33
  circle w23.62 net U36_1: c3394.63,3282.9 r90.55
  circle w23.62 net U36_1: c3394.63,3282.9 r68.26
  circle w10 net U36_1: c3394.63,3282.9 r53.15
  circle w10 net U36_1: c3131.12,3282.9 r104.33
  circle w23.62 net U36_1: c3131.12,3282.9 r90.55
  circle w23.62 net U36_1: c3131.12,3282.9 r68.26
  circle w10 net U36_1: c3131.12,3282.9 r53.15
  circle w10 net U36_1: c2867.58,3282.9 r104.33
  circle w23.62 net U36_1: c2867.58,3282.9 r90.55
  circle w23.62 net U36_1: c2867.58,3282.9 r68.26
  circle w10 net U36_1: c2867.58,3282.9 r53.15
  circle w10 net U36_1: c2604.08,3282.9 r104.33
  circle w23.62 net U36_1: c2604.08,3282.9 r90.55
  circle w23.62 net U36_1: c2604.08,3282.9 r68.26
  circle w10 net U36_1: c2604.08,3282.9 r53.15
  circle w10 net U36_1: c2375.73,3282.9 r104.33
  circle w23.62 net U36_1: c2375.73,3282.9 r90.55
  circle w23.62 net U36_1: c2375.73,3282.9 r68.26
  circle w10 net U36_1: c2375.73,3282.9 r53.15
  circle w10 net U36_1: c2375.72,2989.59 r104.33
  circle w23.62 net U36_1: c2375.72,2989.59 r90.55
  circle w23.62 net U36_1: c2375.72,2989.59 r68.26
  circle w10 net U36_1: c2375.72,2989.59 r53.15
  circle w10 net U36_1: c2604.07,2989.59 r104.33
  circle w23.62 net U36_1: c2604.07,2989.59 r90.55
  circle w23.62 net U36_1: c2604.07,2989.59 r68.26
  circle w10 net U36_1: c2604.07,2989.59 r53.15
  circle w10 net U36_1: c2867.58,2989.59 r104.33
  circle w23.62 net U36_1: c2867.58,2989.59 r90.55
  circle w23.62 net U36_1: c2867.58,2989.59 r68.26
  circle w10 net U36_1: c2867.58,2989.59 r53.15
  circle w10 net U36_1: c3131.12,2989.59 r104.33
  circle w23.62 net U36_1: c3131.12,2989.59 r90.55
  circle w23.62 net U36_1: c3131.12,2989.59 r68.26
  circle w10 net U36_1: c3131.12,2989.59 r53.15
  circle w10 net U36_1: c3394.64,2989.59 r104.33
  circle w23.62 net U36_1: c3394.64,2989.59 r90.55
  circle w23.62 net U36_1: c3394.64,2989.59 r68.26
  circle w10 net U36_1: c3394.64,2989.59 r53.15
  circle w10 net U36_1: c3658.17,2989.59 r104.33
  circle w23.62 net U36_1: c3658.17,2989.59 r90.55
  circle w23.62 net U36_1: c3658.17,2989.59 r68.26
  circle w10 net U36_1: c3658.17,2989.59 r53.15
  circle w10 net U36_1: c3921.67,2989.59 r104.33
  circle w23.62 net U36_1: c3921.67,2989.59 r90.55
  circle w23.62 net U36_1: c3921.67,2989.59 r68.26
  circle w10 net U36_1: c3921.67,2989.59 r53.15
  circle w10 net U36_1: c4185.22,2989.59 r104.33
  circle w23.62 net U36_1: c4185.22,2989.59 r90.55
  circle w23.62 net U36_1: c4185.22,2989.59 r68.26
  circle w10 net U36_1: c4185.22,2989.59 r53.15
  circle w10 net U36_1: c4448.73,2989.59 r104.33
  circle w23.62 net U36_1: c4448.73,2989.59 r90.55
  circle w23.62 net U36_1: c4448.73,2989.59 r68.26
  circle w10 net U36_1: c4448.73,2989.59 r53.15
  circle w10 net U36_1: c4677.07,2989.59 r104.33
  circle w23.62 net U36_1: c4677.07,2989.59 r90.55
  circle w23.62 net U36_1: c4677.07,2989.59 r68.26
  circle w10 net U36_1: c4677.07,2989.59 r53.15
  circle w10 net U36_1: c4392.54,2696.28 r104.33
  circle w23.62 net U36_1: c4392.54,2696.28 r90.55
  circle w23.62 net U36_1: c4392.54,2696.28 r68.26
  circle w10 net U36_1: c4392.54,2696.28 r53.15
  circle w10 net U36_1: c4083.49,2696.28 r104.33
  circle w23.62 net U36_1: c4083.49,2696.28 r90.55
  circle w23.62 net U36_1: c4083.49,2696.28 r68.26
  circle w10 net U36_1: c4083.49,2696.28 r53.15
  circle w10 net U36_1: c3526.4,2696.28 r104.33
  circle w23.62 net U36_1: c3526.4,2696.28 r90.55
  circle w23.62 net U36_1: c3526.4,2696.28 r68.26
  circle w10 net U36_1: c3526.4,2696.28 r53.15
  circle w10 net U36_1: c2969.32,2696.28 r104.33
  circle w23.62 net U36_1: c2969.32,2696.28 r90.55
  circle w23.62 net U36_1: c2969.32,2696.28 r68.26
  circle w10 net U36_1: c2969.32,2696.28 r53.15
  circle w10 net U36_1: c2660.26,2696.28 r104.33
  circle w23.62 net U36_1: c2660.26,2696.28 r90.55
  circle w23.62 net U36_1: c2660.26,2696.28 r68.26
  circle w10 net U36_1: c2660.26,2696.28 r53.15
Document:
  lines w6 net S$106554: 3277.62,3939.16 3828.8,3939.16
  lines w10: 3526.4,2402.5 3526.4,5682.5 ; 3361.91,3922.44 3361.93,3955.87 ; 3361.91,3922.44 3369.7,3846.24 ; 3361.91,3922.44 3361.93,3955.87 ; 3361.91,3922.44 3369.7,3846.24 ; 3361.93,3955.87 3369.7,4032.07 ; 3361.93,3955.87 3369.7,4032.07 ; 3369.69,3846.24 ccw(c3440.73,3853.5) 3433.48,3782.46 ; 3369.69,3846.24 ccw(c3440.73,3853.5) 3433.48,3782.46 ; 3369.7,4032.07 cw(c3440.74,4024.82) 3433.48,4095.86 ; 3369.7,4032.07 cw(c3440.74,4024.82) 3433.48,4095.86 ; 3433.49,3782.46 3509.68,3774.69 ; 3433.49,3782.46 3509.68,3774.69 ; 3433.48,4095.86 3509.68,4103.65 ; 3433.48,4095.86 3509.68,4103.65 ; 3509.68,3774.69 3543.12,3774.67 ; 3509.68,3774.69 3543.12,3774.67 ; 3509.68,4103.65 3543.11,4103.63 ; 3509.68,4103.65 3543.11,4103.63 ; 3543.12,3774.67 3619.31,3782.46 ; 3543.12,3774.67 3619.31,3782.46 ; 3543.11,4103.63 3619.31,4095.85 ; 3543.11,4103.63 3619.31,4095.85 ; 3619.31,3782.46 ccw(c3612.05,3853.5) 3683.09,3846.25 3690.86,3922.44 3690.89,3955.87 3683.1,4032.07 ccw(c3612.05,4024.81) 3619.3,4095.85